# Altium PCB MavSword_V1.0.PcbDoc
Units mm, origin at the board's own origin, x right, y up, seen from the top; angles counter-clockwise.
Board outline 51.45 x 45.02 mm, 2 copper layers (Top Layer, Bottom Layer), stack 1.271 mm thick; 108 components, 87 nets, 345 pads, 147 vias.
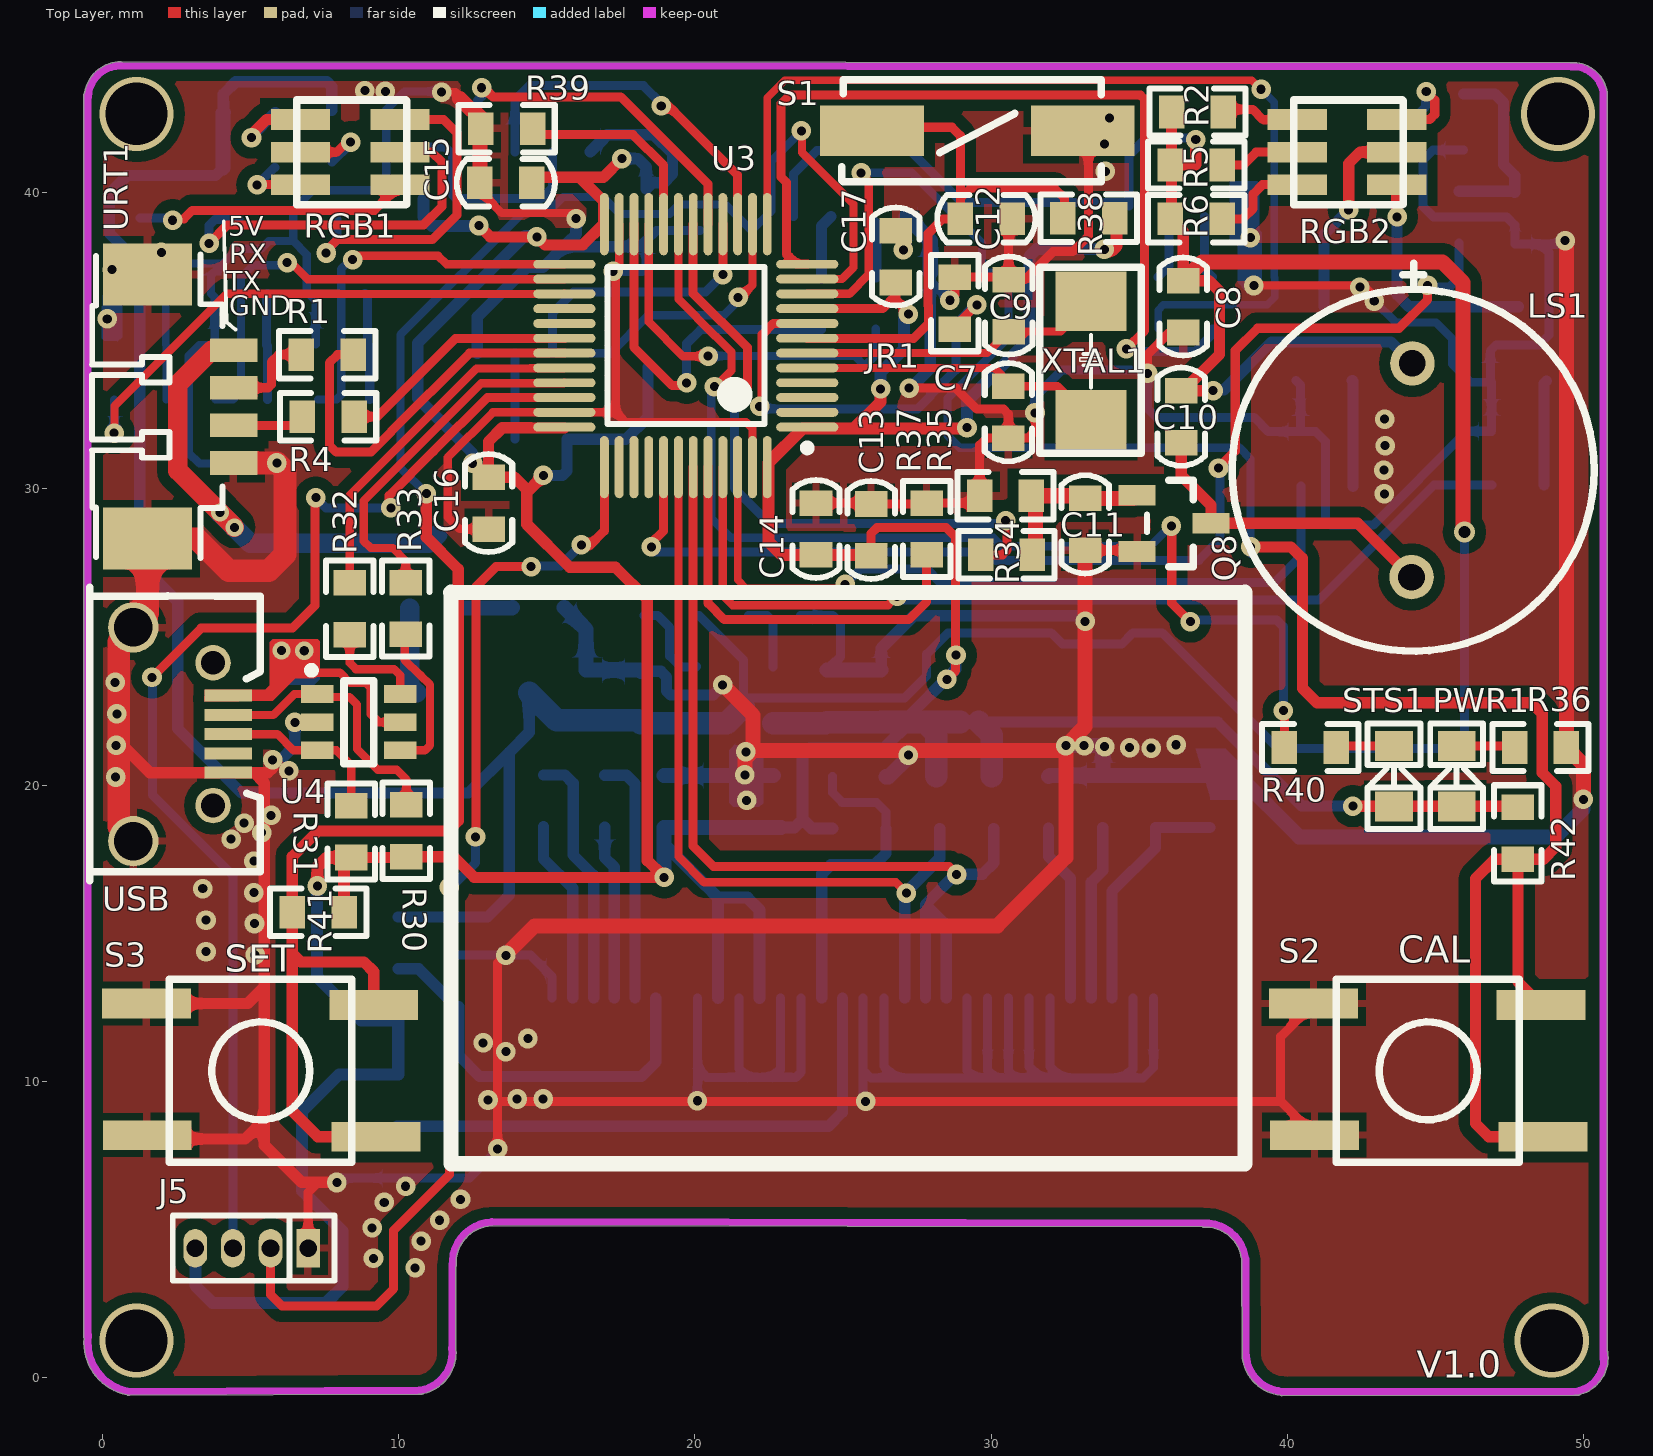
[diagram p0: Top Layer view]
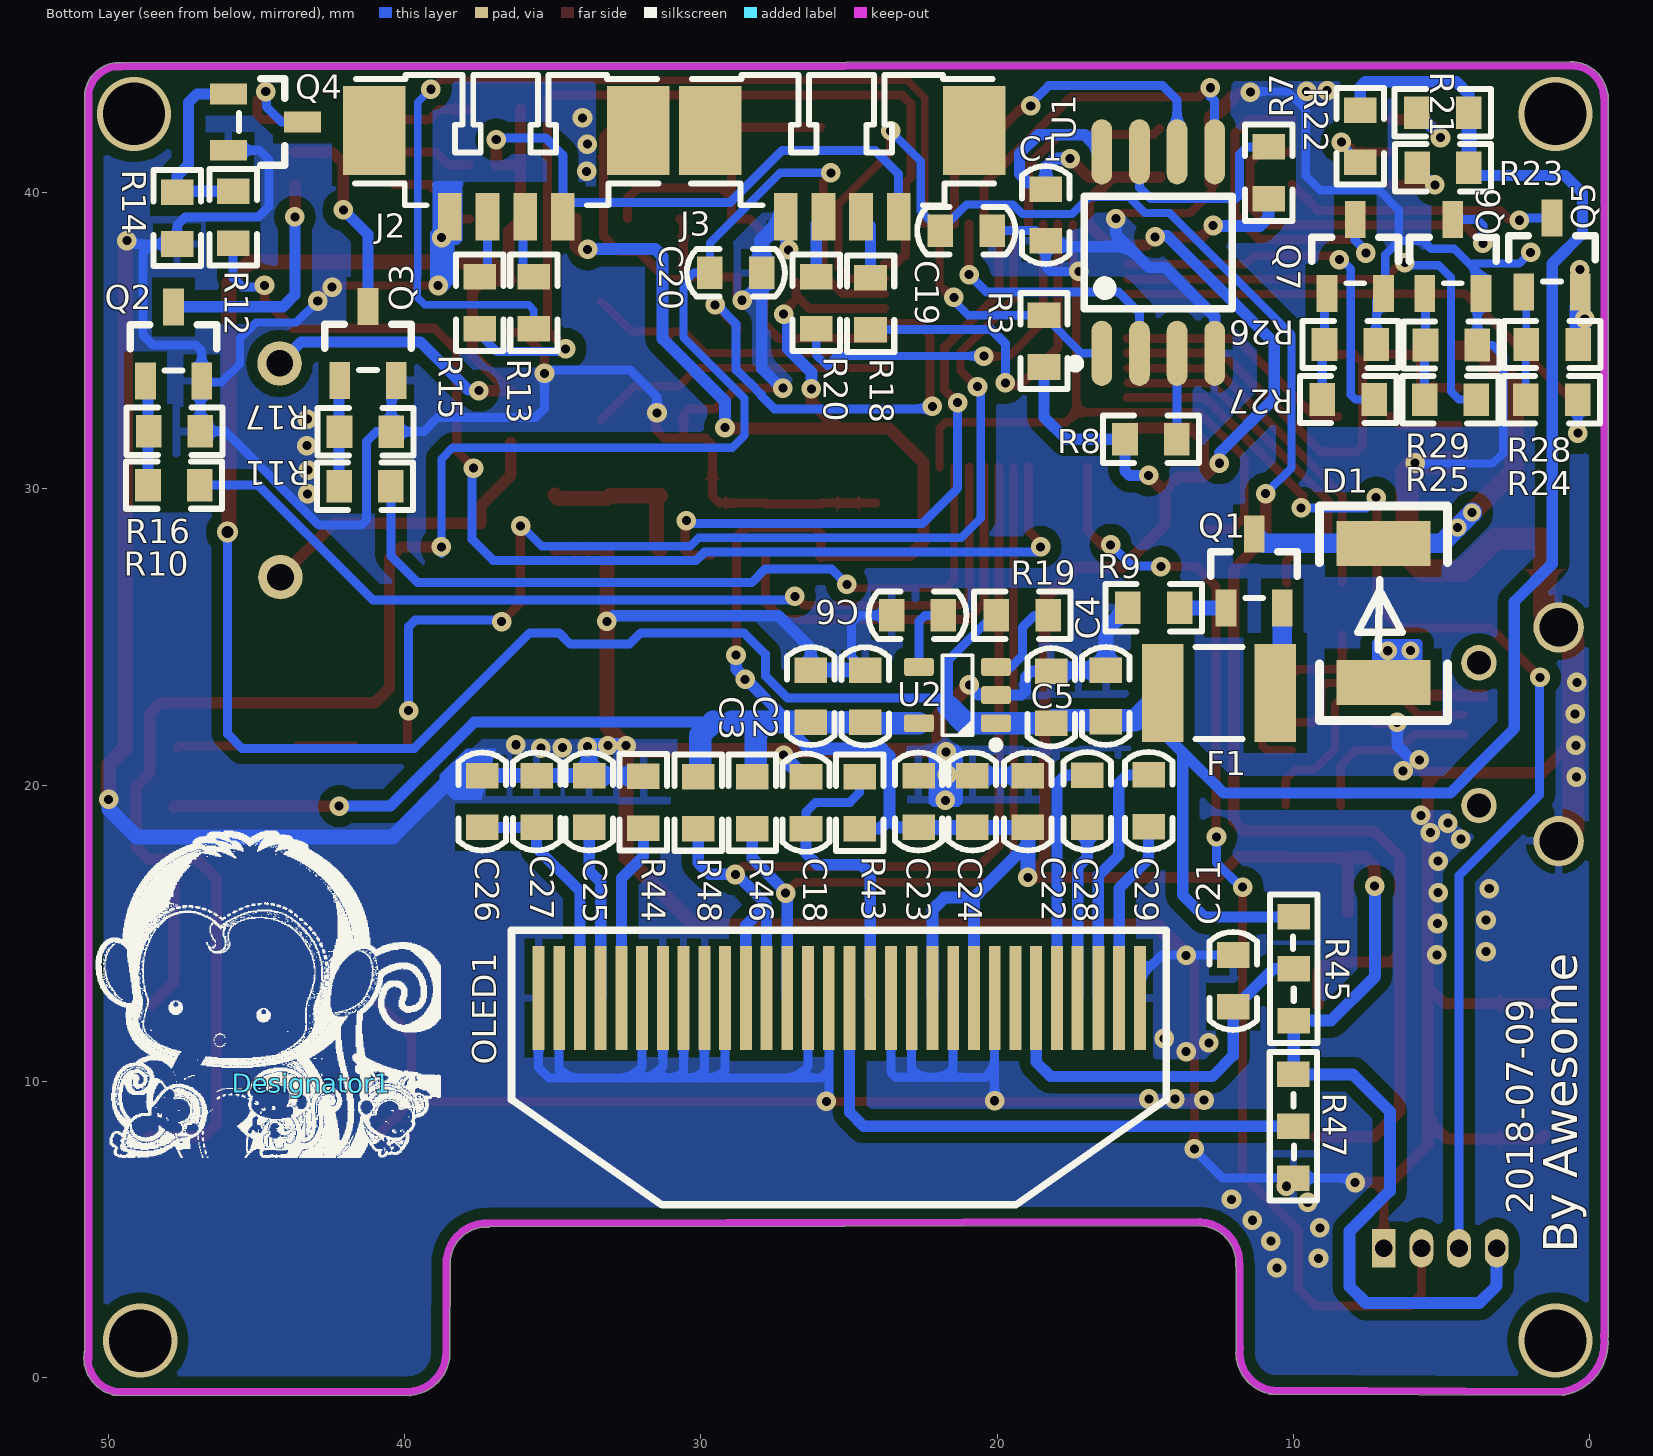
[diagram p1: Bottom Layer view, seen from below]
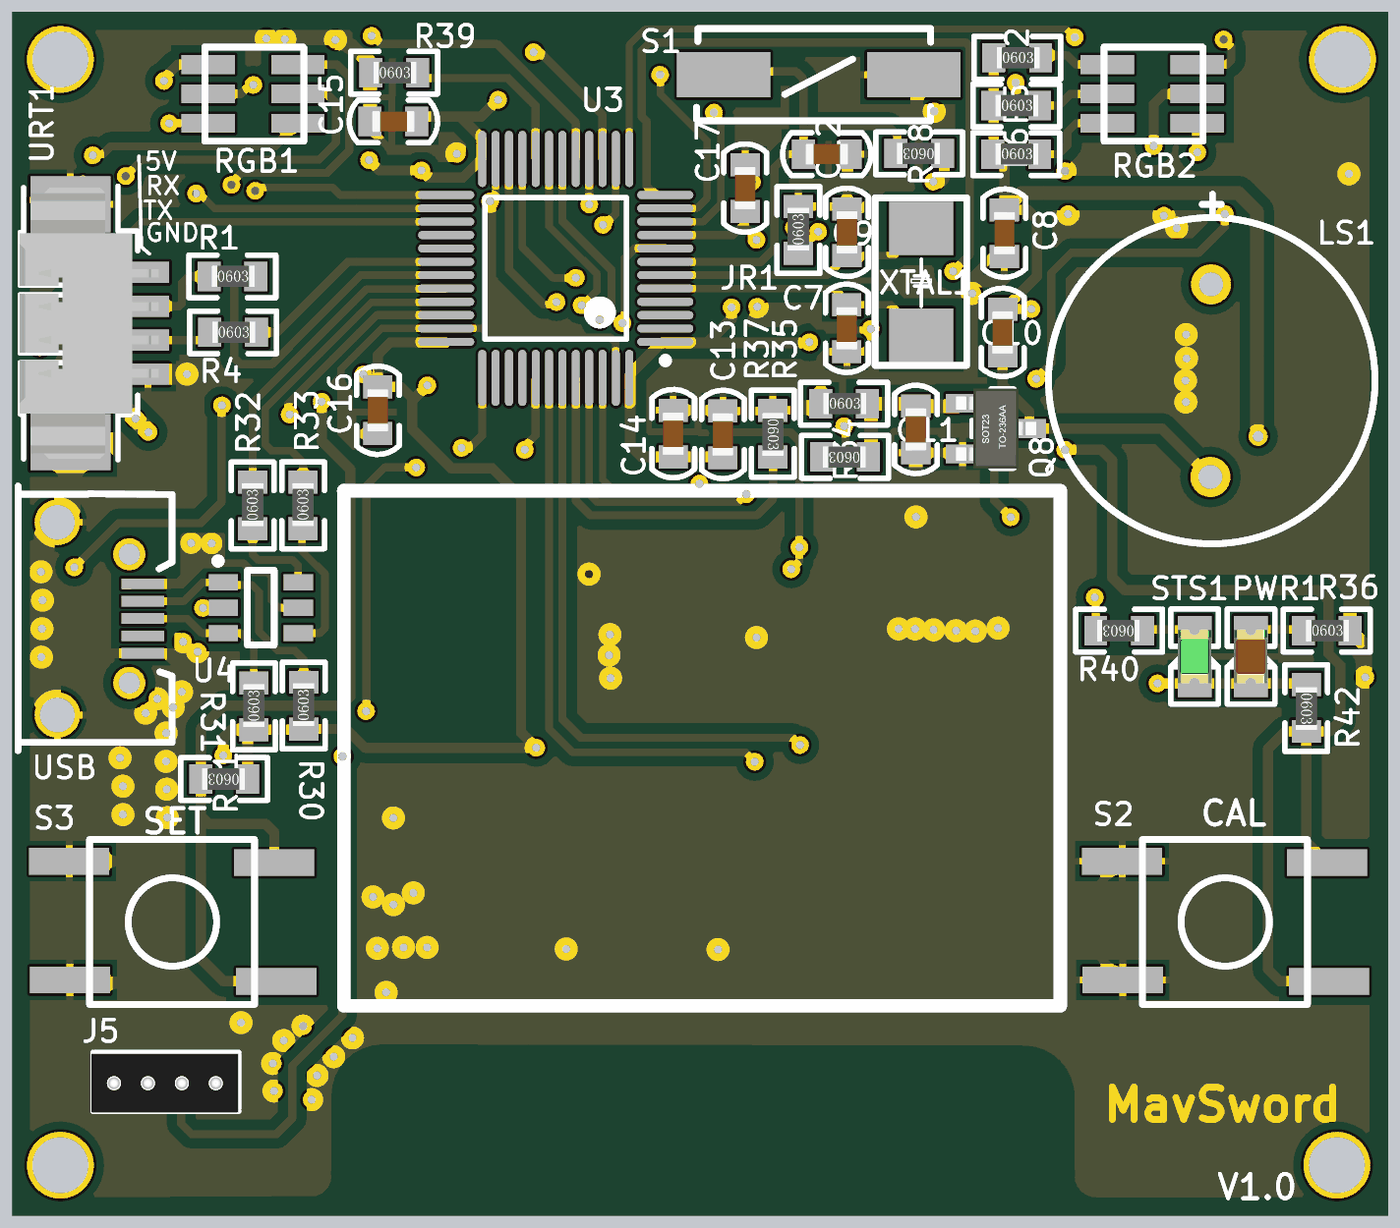
[diagram p2: 3D render of the assembled board from above, using the file's embedded part models]
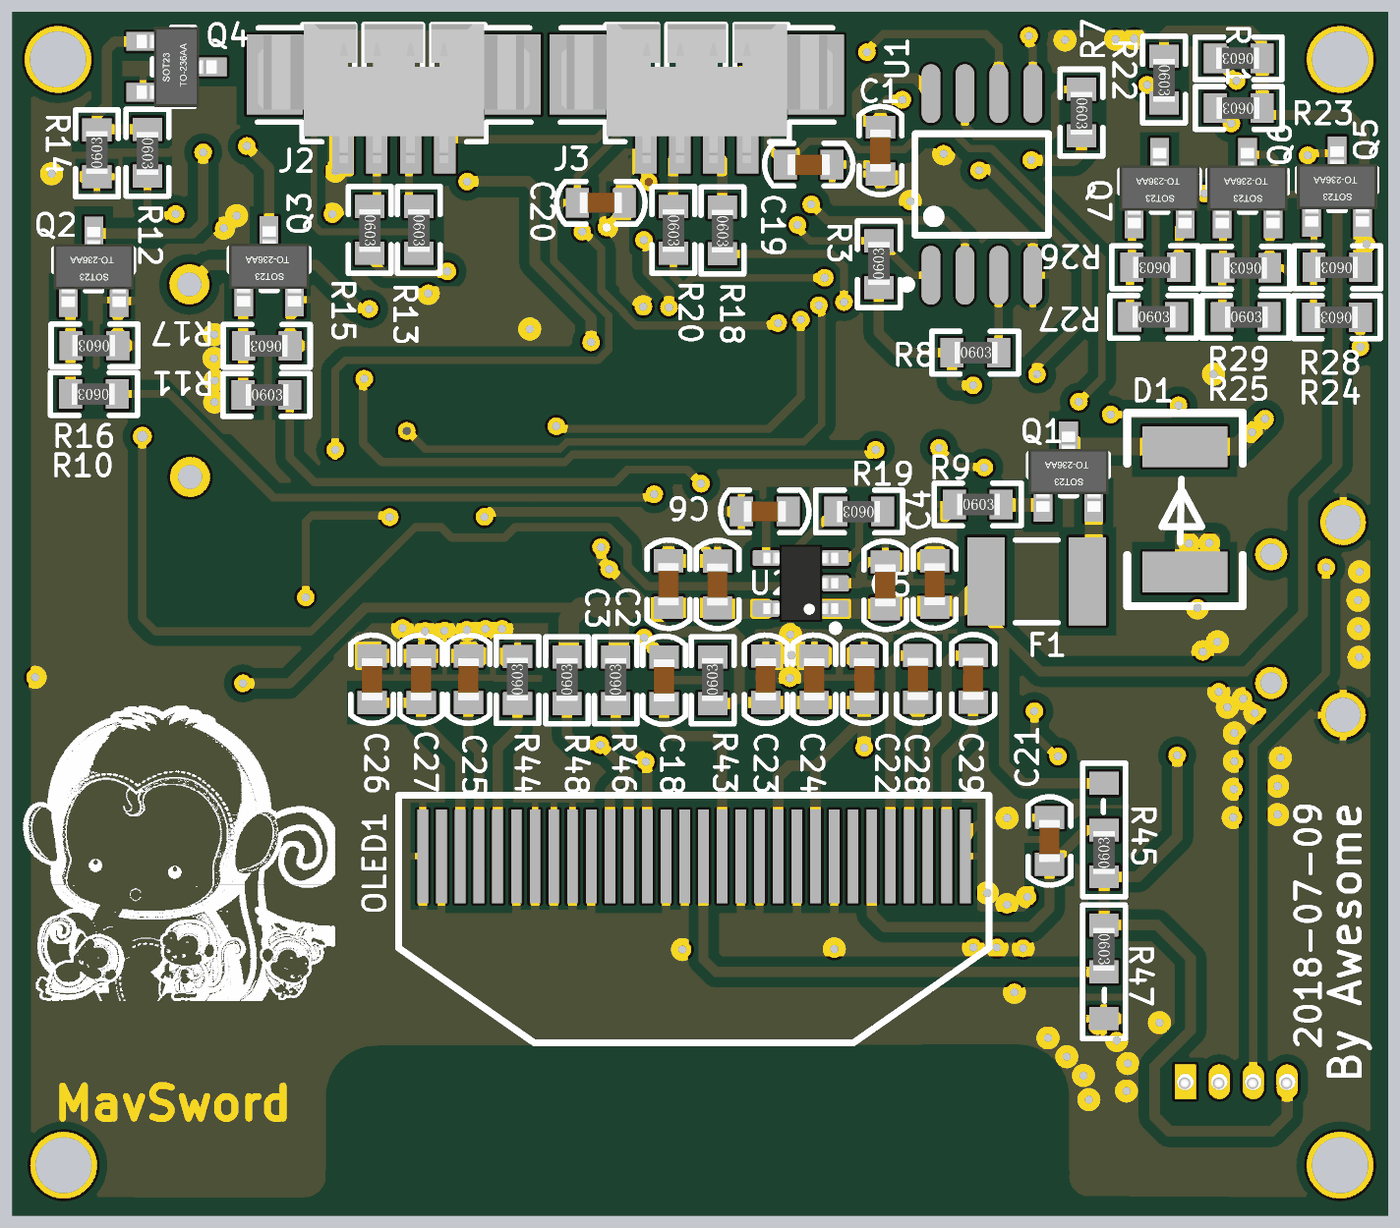
[diagram p3: 3D render of the assembled board from below, using the file's embedded part models]

## Layer stack, top to bottom
Top Solder: solder mask 0.0102, Solder Resist, Dk 3.5
Top Layer: signal copper 0.0356
Dielectric1: core 1.2, FR-4, Dk 4.8
Bottom Layer: signal copper 0.0356
Bottom Solder: solder mask 0.0102, Solder Resist, Dk 3.5

## Board outline
0.824,-0.586 ccw(c0.892,-0.478) 0.892,-0.605 10.659,-0.557 ccw(c10.701,-0.437) 10.718,-0.563 ccw(c10.527,0.834) 10.76,-0.557 10.783,-0.557 ccw(c10.782,-0.429) 10.846,-0.54 ccw(c10.527,0.834) 11.919,0.604 ccw(c11.808,0.668) 11.936,0.668 11.936,0.765 ccw(c10.527,0.834) 11.938,0.834 ccw(c10.527,0.834) 11.936,0.903 11.936,3.744 ccw(c11.816,3.787) 11.943,3.787 ccw(c11.816,3.787) 11.943,3.794 cw(c13.204,3.86) 13.138,5.12 ccw(c13.132,5.248) 13.167,5.125 37.132,5.082 ccw(c37.158,5.207) 37.164,5.08 cw(c37.225,3.844) 38.46,3.905 ccw(c38.588,3.912) 38.463,3.884 38.473,0.911 ccw(c38.595,0.876) 38.468,0.879 ccw(c39.914,0.846) 39.756,-0.592 ccw(c39.83,-0.488) 39.83,-0.615 49.701,-0.595 ccw(c49.736,-0.472) 49.757,-0.598 ccw(c49.544,0.664) 49.775,-0.595 49.81,-0.595 ccw(c49.809,-0.467) 49.886,-0.569 ccw(c49.544,0.664) 50.824,0.664 ccw(c49.544,0.664) 50.806,0.877 ccw(c50.681,0.856) 50.796,0.911 50.791,43.223 ccw(c50.676,43.277) 50.803,43.277 ccw(c50.676,43.277) 50.803,43.284 ccw(c49.639,43.216) 49.571,44.379 ccw(c49.578,44.252) 49.553,44.377 0.631,44.407 cw(c0.61,43.188) 0.632,44.407 0.631,44.407 ccw(c0.61,43.188) -0.596,43.372 ccw(c-0.495,43.294) -0.623,43.294 -0.623,1.369 ccw(c-0.495,1.369) -0.615,1.324 ccw(c1.177,1.177)

## Design rules (kind name [scope] priority, off if disabled: settings)
Clearance [All] p1: gap=0.191
HoleSize [All] p1: absolutevalues=TRUE maxlimit=5.08 minlimit=0.025 maxpercent=80.000 minpercent=20.000
HoleToHoleClearance [All] p1: gap=0.051 allowstackedmicrovias=TRUE
MinimumSolderMaskSliver [All] p1: minsoldermaskwidth=-0.051
PolygonConnect PolygonConnect_1 [IsPad] p1: connectstyle=Relief reliefconductorwidth=0.254 reliefentries=4 polygonreliefangle="90 Angle" airgapwidth=0.254
PolygonConnect [All] p2: connectstyle=Direct reliefconductorwidth=0.254 reliefentries=4 polygonreliefangle="90 Angle" airgapwidth=0.254
RoutingVias [All] p1: holewidth=0.305 width=0.508 viastyle="Through Hole" minholewidth=0.305 minwidth=0.508 maxholewidth=0.711 maxwidth=1.27
SilkToSilkClearance [All] p1: silktosilkclearance=-0.254
SilkToSolderMaskClearance SilkscreenOverComponentPads [IsPad] p1: minsilkscreentomaskgap=-0.254 clearancetoexposedcopper=TRUE
SolderMaskExpansion [All] p1: expansion=0.102
Width [All] p1: maxlimit=2.032 minlimit=0.178 preferedwidth=0.254
25 further rules are at their usual default settings.

## Components (designator, comment, footprint, x,y, rotation, side; value= is the part's Value field where it differs from the comment)
C1 "0.1uF" C0603B 18.357,39.24 r90 bottom
C2 "1uF/16V" C0603B 24.455,22.992 r90 bottom
C3 "0.1uF" C0603B 26.289,23.001 r90 bottom
C4 "1uF/16V" C0603B 16.327,23.005 r90 bottom
C5 "0.1uF" C0603B 18.176,22.962 r270 bottom
C6 "22nF" C0603B 22.686,25.728 r180 bottom
C7 "22p" C0603B 30.584,32.586 r270 top
C8 "0.1uF" C0603B 36.485,36.149 r90 top
C9 "22p" C0603B 30.592,36.181 r90 top
C10 "0.1uF" C0603B 36.416,32.433 r90 top
C11 "0.1uF" C0603B 33.17,28.799 r90 top
C12 "0.1uF" C0603B 29.836,39.108 r180 top
C13 "4.7uF/16V" C0603B 25.949,28.611 r90 top
C14 "0.1uF" C0603B 24.089,28.642 r270 top
C15 "0.1uF" C0603B 13.619,40.33 r0 top
C16 "0.1uF" C0603B 13.035,29.515 r90 top
C17 "0.1uF" C0603B 26.782,37.837 r270 top
C18 "4.7uF" C0603B 26.452,19.404 r90 bottom
C19 "0.1uF" C0603B 21.04,38.715 r0 bottom
C20 "0.1uF" C0603B 28.819,37.287 r0 bottom
C21 "0.1uF" C0603B 12.032,13.387 r90 bottom
C22 "0.1uF" C0603B 18.961,19.444 r90 bottom
C23 "0.1uF" C0603B 22.652,19.444 r90 bottom
C24 "Cap Pol1" C0603B 20.833,19.444 r90 bottom
C25 "4.7uF" C0603B 33.772,19.444 r90 bottom
C26 "2.2uF" C0603B 37.379,19.444 r90 bottom
C27 "0.1uF" C0603B 35.545,19.444 r270 bottom
C28 "Cap Pol1" C0603B 16.954,19.454 r90 bottom
C29 "Cap Pol1" C0603B 14.887,19.464 r90 bottom
D1 "SS24" D1812 7.015,28.28 r90 bottom
Designator1 "Comment" houzi 43.142,9.952 r180 bottom
F1 "1.5A/8V" 1812 12.509,23.109 r0 bottom
J2 "UART2" SIPA4-1.27-SMT-H 34.661,39.187 r0 bottom
J3 "UART3" SIPA4-1.27-SMT-H 23.322,39.187 r0 bottom
J5 "SWD" SIP4-1.27 6.947,4.366 r0 top
JR1 "0R" R0603B 28.776,36.266 r90 top
LS1 "Bell" BEEP12*7.5 44.191,34.232 r270 top locked
OLED1 "0.96OLED" 0.96OLED 15.182,12.812 r0 bottom locked
PWR1 "LED" LED0805R 45.71,20.295 r90 top
Q1 "PMOS-2" SOT-23-3 11.148,27.244 r270 bottom
Q2 "S8050" SOT-23-3 47.622,34.915 r270 bottom
Q3 "S8050" SOT-23-3 41.059,34.932 r270 bottom
Q4 "S8050" SOT-23-3 44.671,42.202 r0 bottom
Q5 "S8050" SOT-23-3 1.095,37.92 r270 bottom
Q6 "S8050" SOT-23-3 4.445,37.861 r270 bottom
Q7 "S8050" SOT-23-3 7.737,37.861 r270 bottom
Q8 "S8050" SOT-23-3 36.192,28.656 r180 top
R1 "120" R0603B 7.592,34.529 r0 top
R2 "150" R0603B 36.965,42.718 r0 top
R3 "10K" R0603B 18.418,34.985 r90 bottom
R4 "120" R0603B 7.62,32.436 r0 top
R5 "180" R0603B 36.927,40.927 r0 top
R6 "180" R0603B 36.927,39.108 r0 top
R7 "10K" R0603B 10.833,40.662 r270 bottom
R8 "10K" R0603B 14.808,31.674 r180 bottom
R9 "10K" R0603B 14.716,25.987 r180 bottom
R10 "4.7K" R0603B 47.786,30.124 r0 bottom
R11 "4.7K" R0603B 41.337,30.086 r180 bottom
R12 "4.7K" R0603B 45.789,39.164 r270 bottom
R13 "120" R0603B 35.634,36.274 r270 bottom
R14 "3.3K" R0603B 47.678,39.136 r90 bottom
R15 "120" R0603B 37.468,36.274 r270 bottom
R16 "3.3K" R0603B 47.766,31.941 r0 bottom
R17 "3.3K" R0603B 41.322,31.928 r0 bottom
R18 "120" R0603B 24.272,36.248 r270 bottom
R19 "10K" R0603B 19.154,25.725 r0 bottom
R20 "120" R0603B 26.109,36.274 r270 bottom
R21 "150" R0603B 4.958,42.697 r0 bottom
R22 "180" R0603B 7.747,41.897 r270 bottom
R23 "180" R0603B 4.95,40.836 r0 bottom
R24 "4.7K" R0603B 1.278,33.002 r0 bottom
R25 "4.7K" R0603B 4.695,33.01 r180 bottom
R26 "4.7K" R0603B 8.151,33.012 r180 bottom
R27 "3.3K" R0603B 8.075,34.869 r0 bottom
R28 "3.3K" R0603B 1.26,34.869 r0 bottom
R29 "3.3K" R0603B 4.665,34.851 r0 bottom
R30 "1.5K" R0603B 10.262,18.456 r90 top
R31 "1.5K" R0603B 8.4,18.428 r90 top
R32 "22" R0603B 8.352,25.95 r90 top
R33 "22" R0603B 10.239,25.956 r90 top
R34 "4.7K" R0603B 30.518,27.767 r180 top
R35 "3.3K" R0603B 30.486,29.764 r0 top
R36 "1K" R0603B 48.543,21.265 r0 top
R37 "10K" R0603B 27.821,28.641 r270 top
R38 "10k" R0603B 33.296,39.134 r180 top
R39 "10K" R0603B 13.645,42.156 r0 top
R40 "1K" R0603B 40.775,21.265 r180 top
R41 "4.7K" R0603B 7.289,15.707 r180 top
R42 "4.7K" R0603B 47.78,18.367 r270 top
R43 "10K" R0603B 24.638,19.404 r90 bottom
R44 "910K" R0603B 31.938,19.414 r90 bottom
R45 "3RES" 3JUMP0603*2 9.987,12.045 r90 bottom
R46 "4.7K" R0603B 28.265,19.406 r90 bottom
R47 "3RES" 3JUMP0603*2 9.997,10.236 r270 bottom
R48 "4.7K" R0603B 30.086,19.406 r90 bottom
RGB1 "RGB3535" RGB3535 6.943,42.462 r0 top
RGB2 "RGB3535" RGB3535 40.59,42.462 r0 top
S1 "SW-PB" SW2PIN_8.2*3.5 33.724,43.81 r180 top
S2 "SW-PB" SW4PIN_9.2*6.15*9 48.633,8.131 r180 top
S3 "SW-PB" SW4PIN_9.2*6.15*9 9.235,8.131 r180 top
STS1 "LED" LED0805G 43.599,20.295 r90 top
U1 "W25Qxx" SOIC-8_208mil 14.562,37.973 r180 bottom
U2 "RT9193" SOT23-5 21.339,23.035 r0 bottom
U3 "STM32F103C8T6" LQFP48_M_STM32 19.694,34.829 r180 top locked
U4 "USBLC6_2" SOT-23-6 8.656,22.121 r180 top locked
URT1 "UART1" SIPA4-1.27-SMT-H 4.43,34.679 r270 top locked (schematic designator J1)
USB "USB-5" MICRO-USB 5.26,21.725 r180 top (schematic designator J4)
XTAL1 "8M" XL5032 33.371,36.329 r270 top

## Footprints (in the part's own frame and the unit in brackets; to place one, negate y for a bottom-side part, rotate by r counter-clockwise, add the part's x,y. Pads: shape width x height; smd on the part's side, far side on the other; paste and mask are expansions set on the pad)
0.96OLED [mm]
  rect 0.4x3.5 smd: 1(0,0) 2(0.7,0) 3(1.4,0) 4(2.1,0) 5(2.8,0) 6(3.5,0) 7(4.2,0) 8(4.9,0) 9(5.6,0) 10(6.3,0) 11(7,0) 12(7.7,0) 13(8.4,0) 14(9.1,0) 15(9.8,0) 16(10.5,0) 17(11.2,0) 18(11.9,0) 19(12.6,0) 20(13.3,0) 21(14,0) 22(14.7,0) 23(15.4,0) 24(16.1,0) 25(16.8,0) 26(17.5,0) 27(18.2,0) 28(18.9,0) 29(19.6,0) 30(20.3,0)
  silkscreen extent -0.89,-2.29 21.21,6.98
3JUMP0603*2 [mm]
  rect 0.862x1.1 smd: 1(0,0) 2(1.75,0) 3(3.503,0)
  silkscreen extent -0.75,-0.8 4.25,0.8, body extent 0.1,-0.4 1.7,0.4, height 0.45
1812 [mm] "Chip Capacitor, Body 4.5x3.2mm, IPC High Density"
  rect 1.4x3.3 smd: 1(-1.9,0) 2(1.9,0)
  silkscreen extent -0.8,-1.55 0.8,1.55, body extent -2.4,-1.7 2.4,1.7, height 1.4
BEEP12*7.5 [mm]
  round 1.5 hole 0.9: 1(0,0.025) 2(7.214,0)
  silkscreen extent -3.38,-6.05 9.71,6.16
C0603B [mm]
  rect 0.862x1.1 smd: 1(-0.875,0) 2(0.875,0)
  silkscreen extent -1.66,-0.8 1.66,0.8, body extent -0.8,-0.4 0.8,0.4, height 0.6
D1812 [mil]
  rect 60x125 smd: 1(-190,-2) 2(-5,-2)
  silkscreen extent -240,-87 45,83
houzi [mm]
  silkscreen extent -7.29,-2.54 4.37,8.48
LED0805G [mil]
  rect 40x50 smd: 1(-40,0) 2(40,0)
  silkscreen extent -70,-35 70,35, body extent -40,-25 40,25, height 43
LED0805R [mil]
  rect 40x50 smd: 1(-40,0) 2(40,0)
  silkscreen extent -70,-35 70,35, body extent -40,-24 40,25, height 43
LQFP48_M_STM32 [mm] "Thin QFP, 48-Leads, Body 7x7mm, Pitch 0.5mm, IPC Low Density"
  oval 2.1x0.3 smd: 1(-4.1,2.75) 2(-4.1,2.25) 3(-4.1,1.75) 4(-4.1,1.25) 5(-4.1,0.75) 6(-4.1,0.25) 7(-4.1,-0.25) 8(-4.1,-0.75) 9(-4.1,-1.25) 10(-4.1,-1.75) 11(-4.1,-2.25) 12(-4.1,-2.75) 25(4.1,-2.75) 26(4.1,-2.25) 27(4.1,-1.75) 28(4.1,-1.25) 29(4.1,-0.75) 30(4.1,-0.25) 31(4.1,0.25) 32(4.1,0.75) 33(4.1,1.25) 34(4.1,1.75) 35(4.1,2.25) 36(4.1,2.75)
  oval 0.3x2.1 smd: 13(-2.75,-4.1) 14(-2.25,-4.1) 15(-1.75,-4.1) 16(-1.25,-4.1) 17(-0.75,-4.1) 18(-0.25,-4.1) 19(0.25,-4.1) 20(0.75,-4.1) 21(1.25,-4.1) 22(1.75,-4.1) 23(2.25,-4.1) 24(2.75,-4.1) 37(2.75,4.1) 38(2.25,4.1) 39(1.75,4.1) 40(1.25,4.1) 41(0.75,4.1) 42(0.25,4.1) 43(-0.25,4.1) 44(-0.75,4.1) 45(-1.25,4.1) 46(-1.75,4.1) 47(-2.25,4.1) 48(-2.75,4.1)
  silkscreen extent -4.23,-2.65 2.65,3.57, body extent -3.5,-3.5 3.5,3.5, height 1.6
MICRO-USB [mm]
  rect 1.6x0.4 smd: 1(1.016,-1.291) 2(1.016,-0.641) 3(1.016,0.009) 4(1.016,0.659) 5(1.016,1.309)
  round 1.2 hole 0.8: 6(1.524,2.419) 7(1.524,-2.4)
  round 1.7 hole 1.3: 8(4.216,3.62) 8(4.216,-3.594)
  silkscreen extent -0.08,-4.95 5.69,4.95
R0603B [mm]
  rect 0.862x1.1 smd: 1(-0.875,0) 2(0.875,0)
  silkscreen extent -1.63,-0.8 1.62,0.8, body extent -0.77,-0.4 0.83,0.4, height 0.45
RGB3535 [mm]
  rect 2x0.7 smd: 1(-0.254,0) 2(-0.254,-1.1) 3(-0.254,-2.2) 4(3.103,0) 5(3.103,-1.1) 6(3.103,-2.2)
  silkscreen extent -0.38,-2.87 3.33,0.66
SIP4-1.27 [mm]
  rect 0.8x1.3 hole 0.6: 1(0,0)
  oval 0.8x1.3 hole 0.6: 2(-1.27,0) 3(-2.54,0) 4(-3.81,0)
  silkscreen extent -4.57,-1.1 0.89,1.1, body extent -4.62,-1.15 0.87,1.05, height 1.2
SIPA4-1.27-SMT-H [mm]
  rect 0.8x1.6 smd: 1(3.81,0) 2(2.54,0) 3(1.27,0) 4(0,0)
  rect 2.1x3 smd: ""(-2.55,-2.9) ""(6.36,-2.9)
  silkscreen extent -3.23,-4.78 7.01,-0.38, body extent -3.17,-4.79 6.98,0.41, height 3.4
SOIC-8_208mil [mm]
  oval 0.7x2.2 smd: 1(-1.905,-3.4) 2(-0.635,-3.4) 3(0.635,-3.4) 4(1.905,-3.4) 5(1.905,3.4) 6(0.635,3.4) 7(-0.635,3.4) 8(-1.905,3.4)
  silkscreen extent -2.95,-3.9 2.5,1.9
SOT23-5 [mm]
  round 0.5 on Mech14: 0(0,0)
  rrect25% 1x0.6 smd: 1(-1.3,0.95) 2(-1.3,0) 3(-1.3,-0.95) 4(1.3,-0.95) 5(1.3,0.95)
  silkscreen extent -1.42,-1.35 0.51,1.81, body extent -1.4,-1.45 1.4,1.45, height 1.44
SOT-23-3 [mm]
  rect 1.25x0.7 smd: 1(1.275,-1.125) 2(-1.225,-0.175) 3(1.275,0.775)
  silkscreen extent -0.62,-1.63 0.93,1.29, body extent -1.47,-1.67 1.53,1.33, height 1.3
SOT-23-6 [mm]
  rect 1.1x0.6 smd: 1(1.4,-0.95) 2(1.4,0) 3(1.4,0.95) 4(-1.4,0.95) 5(-1.4,0) 6(-1.4,-0.95)
  silkscreen extent -0.5,-1.87 1.72,1.4
SW2PIN_8.2*3.5 [mm]
  rect 3.5x1.7 smd: 1(0.635,1.727) 2(7.747,1.727)
  silkscreen extent 0,0 8.76,3.45
SW4PIN_9.2*6.15*9 [mm]
  rect 3x1 smd: 1(0,0) 1(0.076,-4.445) 2(7.722,-0.051) 2(7.747,-4.496)
  silkscreen extent 0.81,-5.31 6.98,0.86
XL5032 [mm]
  rect 2x2.4 smd: 1(0,0) 2(4,0)
  silkscreen extent -1.14,-1.73 5.13,1.7, body extent -0.84,-1.73 4.75,1.7, height 1.5

## Part data
C1 C3 C5 C6 C7 C8 C9 C10 C11 C12 C14 C15 C16 C17 C18 C19 C20 C21 C23 C25 C26 C27: library part Cap, "Capacitor"
C2 C4 C13 C22: library part "Cap Pol1", "Polarized Capacitor (Radial)"
C24 C28 C29: "Polarized Capacitor (Radial)"
D1: library part "D Schottky", "Schottky Diode"
F1: library part "Fuse 1", "Fuse"
J2 J3 J5 URT1: library part "Header 4", "Header, 4-Pin"
JR1: library part Res1, "Resistor"
LS1: "Electrical Bell"
Q1: "P-Channel Power MOSFET"
Q2 Q3 Q4 Q5 Q6 Q7 Q8: library part NPN, "NPN Bipolar Transistor"
R1 R2 R3 R4 R5 R6 R7 R8 R9 R10 R11 R12 R13 R14 R15 R16 R17 R18 R19 R20 R21 R22 R23 R24 R25 R26 R27 R28 R29 R30 R31 R32 R33 R34 R35 R36 R37 R38 R39 R40 R41 R42 R43 R44 R46 R48: library part Res3, "Resistor"
R45 R47: library part 3JumpR
S1 S2 S3: "Switch"
U1: library part W25QXX
U2: library part TLV70033
U3: library part STM32F101C8T6, "STM32 ARM-based 32-bit MCU with 64 Kbytes Flash, 48-pin LQFP, Industrial Temperature"
USB: library part USB5
XTAL1: library part XTAL, "Crystal Oscillator"

## Via types
v1: diameter 0.66, hole 0.305, Top Layer to Bottom Layer, 138 vias
v2: diameter 2.5, hole 2.1, Top Layer to Bottom Layer, 4 vias
v3: diameter 0.61, hole 0.305, Top Layer to Bottom Layer, 4 vias
v4: diameter 0.711, hole 0.406, Top Layer to Bottom Layer, 1 vias

## Nets (pads, with @x,y where several pads share a name; then routed paths per layer and width w, separated by ;. In a path a pad name is that pad's centre, name@x,y a point inside that pad or via, vN(x,y) a via of type N, cw(c..) or ccw(c..) an arc to the next point about the centre after c; other vN are vias at no path point)
3V3-STM: C1.2 C2.1 C3.1 C13.1 C14.2 C15.2 C16.2 C17.2 C22.1 C23.1 C24.1 J5.4 OLED1.9 OLED1.11 PWR1.1 R3.1 R7.2 R8.1 R30.1 R31.1 R38.1 R41.1 R42.1 R43.1 R45.1 R46.2 R47.1 R48.2 STS1.1 U1.8 U2.5 U3.1 U3.9 U3.24 U3.36 U3.48 | length 200.6
  Top Layer w0.305: 13.833,32.079 U3.36 ; U3.9 26.335,36.079 26.782,36.525 ; C13.1 25.949,28.491 26.147,28.689 28.484,28.689 28.804,28.369 28.804,23.863 v1(28.506,23.566) ; C17.2 26.782,36.525 ; v1@27.14,36.043 26.782,36.401 26.782,36.525
  Top Layer w0.381: R31.1 10.234,17.553 R30.1 11.855,17.581 12.555,16.881 v1(18.961,16.881) 18.395,17.447 18.395,26.271 17.32,27.346 15.778,27.346 14.323,28.801 14.323,29.878 ; v1@12.551,30.874 C16.2 ; v1(12.71,38.885) 13.096,38.499 v1(14.666,38.499) 14.938,38.227 16.211,38.227 16.913,38.929 16.913,39.714 16.111,40.516 ; C15.2@14.503,40.516 16.111,40.516 ; v1@14.966,30.521 14.323,29.878 ; U3.36@15.594,32.048 14.463,32.048 14.463,32.058 13.496,32.058 13.035,31.598 C16.2 ; v1@17.582,41.186 v1(17.539,41.143) 16.911,40.516 16.111,40.516 ; v1@42.134,19.279 STS1.1 PWR1.1 47.743,19.279 R42.1 ; C16.2 13.905,30.39 14.323,29.972 14.323,29.878
  Top Layer w0.406: v1(7.254,16.591) 7.254,17.231 7.576,17.553 R31.1 8.164,17.316 R41.1 ; C13.1 25.917,27.767 C14.2 22.926,27.767 22.487,28.206 22.487,30.885 23.638,32.035 25.37,32.035 ; v1(26.271,33.371) 26.271,32.937 25.37,32.035 ; v1(29.185,32.065) 29.155,32.035 25.37,32.035 ; v1(33.823,38.08) 33.924,38.08 33.99,38.014 34.046,38.07 34.077,38.039 34.23,38.193 R38.1@34.23,39.129
  Bottom Layer w0.381: v1(12.497,30.861) 12.497,31.206 10.648,33.056 10.648,34.92 14.272,38.544 v1@14.569,38.544 ; v1(14.887,30.45) 15.535,30.45 15.683,30.598 R8.1 17.678,31.674 18.418,32.413 R3.1 ; U1.8 17.042,41.948 18.613,41.948 19.243,41.318 19.243,40.622 18.948,40.328 18.569,40.328 C1.2 18.357,40.858 18.072,41.143 v1(17.539,41.143) ; 27.021,22.126 28.804,23.909 v1@28.804,24.346 ; 28.959,22.126 29.578,22.126 37.645,22.126 40.483,19.289 v1(42.212,19.289)
  Bottom Layer w0.406: J5.4 3.137,3.101 3.724,2.515 7.549,2.515 8.1,3.066 8.1,4.945 6.746,6.299 6.746,8.987 7.996,10.236 R47.1 9.987,10.246 R45.1 8.735,12.045 7.242,13.538 v1@7.242,16.566 ; R7.2 10.833,39.167 11.125,38.875 v1@12.784,38.875 ; 18.961,18.009 20.34,16.629 20.35,16.629 20.782,16.198 ; OLED1.9 20.782,16.198 ; OLED1.11 22.182,15.789 21.773,16.198 20.782,16.198 ; C23.1@22.906,18.569 23.369,18.569 23.637,18.837 ; R43.1 23.945,18.529 23.637,18.837 ; v1(26.271,33.371) 26.271,33.929 27.052,34.71 27.052,35.737 27.208,35.893 v1(27.206,35.895) ; 27.282,22.126 27.264,22.126 26.429,21.29 26.429,21.273 26.38,21.224 23.873,21.224 23.637,20.988 23.637,18.837 ; v1(29.185,32.065) 29.185,32.958 31.29,35.064 31.29,37.841 31.539,38.09 33.818,38.09 33.823,38.085 v1(33.823,38.08)
  Bottom Layer w0.508: v1@18.961,16.901 18.961,18.009 C22.1 C24.1 C23.1 C23.1@22.906,18.569
  Bottom Layer w0.762: U2.5 24.423,22.085 C2.1 26.28,22.117 C3.1 27.021,22.126 27.264,22.126 ; 27.282,22.126 27.755,22.126 ; R46.2@28.148,20.289 28.148,21.732 27.755,22.126 ; 28.959,22.126 27.755,22.126 ; 29.578,22.126 30.023,21.681 R48.2@30.023,20.289
  other v1: 28.814,24.384
5V-OUT: C4.1 C5.2 C8.2 C10.2 F1.2 J2.4 J3.4 LS1.1 R2.1 R5.1 R6.1 R19.2 R21.1 R22.1 R23.1 R45.3 U2.1 | length 158.4
  Top Layer w0.381: R5.1 R5.1@36.086,40.927 ; R2.1@36.086,42.807 R5.1@36.086,40.927 ; C10.2 C10.2@36.481,33.308 ; v1(36.906,41.783) 36.906,40.942 36.891,40.927 R5.1@36.086,40.927 ; v1(37.49,33.31) 37.489,33.308 C10.2@36.481,33.308 ; R5.1@36.086,40.927 36.086,39.143 R6.1 36.485,38.675 C8.2 37.347,37.024 37.706,36.665 37.706,34.534 C10.2@36.481,33.308
  Top Layer w0.508: C8.2 37.116,37.655 45.235,37.655 45.931,36.96 v4@45.931,28.471
  Bottom Layer w0.305: R19.2 20.135,25.725 21.646,24.214 21.646,22.931 ; 21.646,22.657 21.646,22.931 ; J3.4 23.322,40.622 24.122,41.422 27.247,41.422 29.002,39.667 34.541,39.667 34.661,39.548 34.661,41.257 35.242,41.839 v1@36.888,41.839 ; v4(45.977,28.539) 45.977,21.725 45.489,21.237 39.67,21.237 35.768,25.138 34.788,25.138 34.402,24.752 32.413,24.752 32.027,25.138 28.545,25.138 27.826,24.42 27.826,23.685 27.071,22.931 21.646,22.931
  Bottom Layer w0.381: R23.1 3.814,40.574 0.838,40.574 0.244,39.98 0.244,38.613 1.262,37.595 1.262,27.47 2.54,26.192 2.54,21.907 4.143,20.305 4.143,20.287 4.697,19.733 12.362,19.733 13.736,21.107 ; R21.1 4.083,43.321 4.501,43.739 7.574,43.739 7.747,43.566 R22.1 ; R45.3 12.997,15.547 13.736,16.286 13.736,21.107 ; F1.2 14.41,21.781 13.736,21.107 ; 37.851,33.335 39.469,34.953 43.495,34.953 LS1.1
  Bottom Layer w0.508: R23.1 4.075,42.69 R21.1
  Bottom Layer w0.762: F1.2 15.337,22.182 18.081,22.182 C5.2 C5.2 U2.1 21.074,22.085 21.646,22.657
5V-USB: D1.1 U4.5 USB.1 | length 4.2
  Top Layer w0.279: 7.064,23.79 8.015,23.79 8.363,23.442 8.893,23.442 9.063,23.271 9.063,22.388 9.329,22.121 U4.5
  other v3: 6.05,24.544 6.815,24.531
5V-VIN: D1.2 Q1.2 URT1.4 | length 15.9
  Top Layer w0.66: URT1.4 3.697,34.679 2.548,33.53 2.548,30.612 v3@4.453,28.707
  Bottom Layer w0.66: v3(3.967,29.2) 3.967,29.18 v3(4.455,28.692) 4.994,28.153 D1.2 11.008,28.153 Q1.2
BEEP: R34.2 U3.18 | length 21.9
  Top Layer w0.305: U3.18 19.944,36.589 20.912,35.621 20.918,35.621 21.778,34.761 21.778,33.35 v1(21.336,32.908) v1@21.336,32.738 ; v1@21.514,32.789 v1@21.514,32.908 ; R34.2 30.376,27.767 30.538,27.93 30.538,28.869 v1(30.486,28.921)
  Bottom Layer w0.305: v1(21.336,32.908) 21.336,30.023 21.332,30.019 22.527,28.824 30.323,28.824 v1@30.486,28.988 ; v1(30.486,28.921) 30.492,28.921 v1@30.518,28.948
BOOT0: R37.2 U3.44 | length 14
  Top Layer w0.305: U3.44 20.444,26.135 20.993,25.585 27.214,25.585 27.821,26.192 R37.2
BOOT1: R39.2 U3.20 | length 6.9
  Top Layer w0.305: R39.2 14.723,41.953 17.91,41.953 18.944,40.919 U3.20
CAL_KEY: C20.2 R42.2 S2.1 U3.10 | length 71.3
  Top Layer w0.279: U3.10 25.215,36.579 25.867,37.231 25.867,40.381 v1@25.615,40.634
  Top Layer w0.381: v1(38.758,28.037) 40.124,28.037 40.51,27.65 40.51,23.264 40.998,22.776 48.235,22.776 48.606,22.405 48.606,20.411 49.055,19.962 49.055,17.902 48.645,17.492 R42.2 ; S2.1@48.557,12.576 47.78,13.353 R42.2 ; S2.1@48.633,8.131 46.792,8.131 46.35,8.572 46.35,16.845 46.996,17.492 R42.2
  Bottom Layer w0.279: v1(25.611,40.663) 27.324,40.663 29.694,38.293 C20.2 30.244,37.287 30.584,36.947 30.584,35.112 28.524,33.052 28.524,31.791 28.929,31.387 38.382,31.387 38.758,31.011 v1(38.758,28.037) v1@38.758,27.798
D/C: OLED1.15 R47.2 | length 19.1
  Bottom Layer w0.381: R47.2@9.947,8.484 24.508,8.484 24.982,8.957 OLED1.15
GND: C1.1 C2.2 C3.2 C4.2 C5.1 C6.1 C7.2 C8.1 C9.2 C11.1 C12.1 C13.2 C14.1 C15.1 C16.1 C17.1 C18.2 C19.1 C20.1 C21.2 C22.2 C23.2 C24.2 C25.2 C26.2 C27.1 J2.1 J3.1 J5.1 JR1.2 OLED1.1 OLED1.8 OLED1.10 OLED1.12 OLED1.13 OLED1.16 OLED1.17 OLED1.21 OLED1.22 OLED1.23 OLED1.24 OLED1.25 OLED1.29 OLED1.30 Q2.3 Q3.3 Q4.3 Q5.3 Q6.3 Q7.3 Q8.3 R9.1 R14.1 R16.1 R17.1 R27.1 R28.1 R29.1 R35.1 R36.2 R37.1 R39.1 R44.2 R47.3 S1.1 S2.2 S3.2 U1.4 U2.2 U3.23 U3.35 U3.47 U4.2 URT1. URT1.1 USB.5 USB.8 | length 432
  Top Layer w0.279: v1(11.45,43.386) 11.923,43.386 12.097,43.212 ; C15.1 12.744,40.044 13.48,39.309 v1@16.055,39.309 ; C16.1 12.061,28.64 11.656,29.045 11.656,31.057 13.178,32.579 U3.35 17.327,32.579 ; v1@17.239,37.28 17.327,37.192 17.327,32.579 ; v1@17.444,37.484 U3.23 ; U3.47 21.944,32.031 21.727,32.248 17.658,32.248 17.327,32.579 ; v1(38.865,36.86) 42.573,36.86 v1@43.035,36.398
  Top Layer w0.305: J5.1 6.947,6.251 7.287,6.591 ; v1(13.345,7.719) 13.345,9.324 ; v1@13.619,14.272 13.345,13.998 13.345,9.324 ; C14.1 C13.2@25.917,29.517 ; C13.2 27.79,29.486 R37.1 29.364,29.516 R35.1 29.611,31.471 29.851,31.711 C7.2 ; v1(27.231,33.393) 28.808,33.393 29.515,32.687 30.42,32.687 30.584,32.522 C7.2 ; v1(28.605,36.363) 28.776,36.533 JR1.2 ; JR1.2@28.74,37.142 30.505,37.142 C9.2 ; C12.1 30.592,38.989 C9.2 ; v1@31.514,32.502 31.514,31.991 31.233,31.711 C7.2 ; S1.1 33.279,41.892 33.279,38.526 32.754,38.001 32.088,38.001 31.143,37.056 C9.2 ; C11.1 34.875,27.924 Q8.3 ; v1(35.278,33.894) 35.278,34.534 36.018,35.274 C8.1 ; S2.2@40.886,12.626 39.769,11.509 39.769,9.324 ; S2.2@40.912,8.181 39.769,9.324 ; 13.345,9.324 39.769,9.324
  Top Layer w0.381: v1@0.554,21.463 1.6,20.417 USB.5 5.116,20.417 ; S3.2@1.488,12.626 4.907,12.626 5.466,13.185 ; S3.2@1.514,8.181 1.641,8.054 4.811,8.054 5.466,8.71 ; v1(5.751,20.848) 5.751,20.584 5.583,20.417 5.116,20.417 ; v1@6.474,22.121 U4.2 ; v1@7.925,6.591 7.287,6.591 6.718,6.591 5.466,7.844 5.466,8.71 ; 5.116,20.417 5.466,20.066 5.466,13.185 ; 5.466,8.71 5.466,13.185
  Top Layer w0.508: 12.063,43.178 12.481,42.761 12.548,42.761 12.77,42.539 R39.1 12.744,42.131 C15.1 ; v1@13.619,14.272 14.595,15.248 30.208,15.248 32.52,17.559 v1@32.52,21.328 ; v1(20.94,23.381) 21.968,22.352 v1@21.968,21.163 ; v1(21.689,20.343) 21.689,20.884 v1@21.968,21.163 ; v1(32.52,21.331) v1@32.52,21.328 ; C11.1 33.17,21.979 v1@32.52,21.328 ; v1@49.317,38.387 49.418,38.285 R36.2 49.987,20.696 v1(49.987,19.517) ; v1@21.968,21.163 32.355,21.163 v1@32.52,21.328
  Top Layer w0.762: USB.8@1.044,18.105 0.554,18.595 0.554,21.463 0.554,24.828 1.044,25.319 1.53,25.805 1.53,28.319 3.182,28.319 4.275,27.226 5.608,27.226 6.165,27.783 6.165,30.597 v1(5.893,30.869) URT1.1
  Bottom Layer w0.279: Q5.3 0.32,37.389 v1(0.328,37.396) ; v1(1.994,37.978) 2.372,37.6 3.949,37.6 4.009,37.54 ; v1@5.893,30.851 3.277,30.851 2.914,31.214 2.914,33.689 2.908,33.695 2.908,34.486 3.274,34.851 R29.1 3.79,36.467 Q6.3 3.67,37.201 4.009,37.54 ; R27.1 7.2,36.348 Q7.3 6.896,36.652 6.896,37.909 6.446,38.359 ; v1@11.415,43.409 10.198,43.409 9.578,42.789 9.578,40.556 9.101,40.079 7.109,40.079 6.446,39.415 6.446,38.359 ; v1(42.931,36.337) 43.658,35.611 45.014,35.611 45.557,35.067 45.557,34.211 46.172,33.596 Q2.3@46.891,33.596 ; 4.009,37.54 4.567,38.097 5.357,38.097 5.618,38.359 6.446,38.359
  Bottom Layer w0.305: v1(0.165,35.735) 0.165,36.49 Q5.3 ; v1(7.917,6.584) 8.067,6.734 R47.3 12.388,6.734 v1@13.36,7.706 ; C21.2 14.448,14.262 15.182,13.528 OLED1.1 ; v1(17.239,37.341) 18.219,37.341 18.357,37.478 C1.1 18.706,38.715 C19.1 ; OLED1.8 20.082,10.444 ; v1(20.086,9.342) 20.082,9.346 20.082,10.444 ; OLED1.10 21.482,10.423 21.778,10.127 ; OLED1.12 22.882,10.403 22.606,10.127 ; C6.1 24.648,25.728 24.917,25.458 24.917,24.329 24.464,23.876 C2.2 ; OLED1.13 23.582,10.305 23.404,10.127 22.606,10.127 ; OLED1.16 25.682,10.368 ; v1(25.766,9.322) 25.682,9.406 25.682,10.368 ; OLED1.17 26.382,10.509 26.782,10.109 ; v1(27.036,38.062) 27.132,38.159 J3.1 ; C20.1@27.944,37.024 v1(28.605,36.363) ; OLED1.21 29.182,10.363 29.436,10.109 ; OLED1.22 29.882,10.344 30.117,10.109 ; OLED1.23 30.582,10.327 30.8,10.109 ; OLED1.24 31.282,10.501 31.674,10.109 ; v1(31.481,32.56) 31.481,33.101 32.382,34.003 35.169,34.003 v1(35.278,33.894) 35.278,32.708 35.578,32.408 38.88,32.408 39.36,31.928 R17.1 ; OLED1.25 31.982,10.502 32.375,10.109 ; OLED1.29 34.782,10.421 34.47,10.109 ; OLED1.30 35.482,10.471 35.121,10.109 34.47,10.109 ; J2.1 38.471,37.02 v1@38.669,36.822 ; Q3.3 40.447,33.494 R17.1 ; Q4.3 44.909,41.427 44.574,41.092 44.574,39.533 44.935,39.172 47.404,39.172 47.678,38.898 R14.1 48.551,38.261 ; v1(49.373,38.372) 49.262,38.261 48.551,38.261 ; 20.082,10.444 20.399,10.127 21.778,10.127 ; 21.778,10.127 22.606,10.127 ; 25.682,10.368 25.941,10.109 26.782,10.109 ; 26.782,10.109 29.436,10.109 ; 29.436,10.109 30.117,10.109 ; 30.117,10.109 30.8,10.109 ; 30.8,10.109 31.674,10.109 ; 31.674,10.109 32.375,10.109 ; 32.375,10.109 34.47,10.109 ; R17.1 40.952,31.928 41.283,31.598 41.283,28.959 41.465,28.776 42.896,28.776 46.061,31.941 R16.1 46.891,33.596 Q2.3 46.847,34.653 47.051,34.856 48.494,34.856 48.831,35.194 48.831,37.981 48.551,38.261
  Bottom Layer w0.381: v1(5.751,20.848) 6.015,20.848 6.495,21.328 v1(6.495,22.113) ; U1.4 12.657,35.804 14.323,37.47 14.872,37.47 15.573,38.171 ; v1(15.992,39.119) 15.992,38.616 16.005,38.603 15.573,38.171 ; C5.1 18.853,23.837 19.045,23.645 19.045,23.172 19.182,23.035 U2.2 20.617,23.035 v1@20.917,23.335 ; C1.1 18.162,38.171 15.573,38.171 ; C3.2 26.289,24.615 27.389,25.715 32.956,25.715 v1@33.21,25.461 ; v1@27.366,33.477 27.944,34.055 27.944,37.024 C20.1
  Bottom Layer w0.508: R9.1 16.327,25.25 C4.2 18.133,23.88 C5.1 ; C22.2 C24.2 C23.2 ; C2.2@24.464,23.876 C3.2 ; C18.2 26.538,20.279 27.206,20.947 v1(27.206,21.006) ; J3.1 27.944,38.376 C20.1 ; R44.2 31.968,20.319 C25.2 ; v1(32.52,21.331) 33.599,21.331 33.772,21.158 C25.2 ; v1@49.98,19.553 49.98,19.182 49.05,18.252 40.396,18.252 38.33,20.319 C26.2 C25.2
  other v1: 10.559,3.701 9.152,4.023 10.759,4.605 9.103,5.055 11.384,5.309 9.515,5.913 12.088,6.012 10.239,6.457 13.018,9.368 13.998,9.401 14.879,9.401 13.622,11.003 12.855,11.293 14.364,11.443 5.156,14.265 13.619,14.249 3.498,14.376 5.136,15.326 3.498,15.438 5.113,16.368 3.388,16.5 5.113,17.429 4.348,18.176 5.377,18.392 4.783,18.712 5.695,18.974 21.745,19.484 0.447,20.269 6.294,20.475 21.722,21.118 35.397,21.247 34.674,21.262 33.833,21.293 33.139,21.328 0.467,21.336 36.243,21.359 0.488,22.403 0.429,23.467 33.175,25.524 43.271,29.825 43.259,30.627 43.297,31.455 43.284,32.349 42.448,36.802 38.753,38.473 33.856,40.711 33.828,41.633 33.995,42.517 9.555,43.414 8.86,43.437
LED: R40.2 U3.19 | length 38.1
  Top Layer w0.279: U3.19 19.444,36.398 20.704,35.138 20.718,35.138 21.236,34.621 21.236,33.992 20.663,33.419 v1(20.663,33.449)
  Top Layer w0.305: v1(36.083,28.743) 36.096,28.73 36.096,26.142 v1(36.723,25.514) ; R40.2 v1@39.9,22.529
  Bottom Layer w0.279: v1(20.663,33.449) 20.556,33.343 20.556,28.999 21.214,28.341 30.077,28.341 30.356,28.062 35.377,28.062 v1@36.109,28.793
  Bottom Layer w0.305: v1@36.708,25.575 39.632,25.575 39.865,25.342 v1(39.865,22.509)
NetC6_2: C6.2 U2.4 | length 2.4
  Bottom Layer w0.305: C6.2 22.433,25.728 22.639,25.522 U2.4
NetC7_1: C7.1 U3.5 XTAL1.2 | length 10.3
  Top Layer w0.279: U3.5 30.116,34.079 30.734,33.461 32.239,33.461 XTAL1.2
NetC9_1: C9.1 U3.6 XTAL1.1 | length 10.3
  Top Layer w0.279: U3.6 29.865,34.579 C9.1 ; C9.1@30.592,35.296 C9.1@30.991,35.296 ; C9.1@31.051,35.171 31.186,35.306 32.347,35.306 XTAL1.1
NetC10_1: C10.1 LS1.2 Q8.2 | length 10.7
  Top Layer w0.381: C10.1 36.416,30.444 37.417,29.443 Q8.2 42.378,28.831 LS1.2
NetC11_2: C11.2 Q8.1 R34.1 R35.2 | length 5.6
  Top Layer w0.508: R34.1@31.377,27.932 31.496,28.052 31.496,29.629 R35.2 33.08,29.764 C11.2 34.81,29.674 Q8.1
NetC18_1: C18.1 OLED1.14 R43.2 | length 10.7
  Bottom Layer w0.305: R43.2 24.638,19.751 24.973,19.416 26.124,19.416 26.452,19.088 C18.1
  Bottom Layer w0.381: OLED1.14 24.282,17.002 24.59,17.31 26.068,17.31 26.452,17.694 C18.1
NetC25_1: C25.1 OLED1.27 | length 5.9
  Bottom Layer w0.381: OLED1.27 33.382,16.727 33.772,17.117 C25.1
NetC26_1: C26.1 C27.2 OLED1.28 | length 8.2
  Bottom Layer w0.381: OLED1.28 34.082,16.416 35.545,17.879 C27.2 C26.1
NetC28_1: C28.1 OLED1.4 | length 5.9
  Bottom Layer w0.381: C28.1 16.954,17.551 17.282,17.224 OLED1.4
NetC28_2: C28.2 OLED1.5 | length 8.4
  Bottom Layer w0.381: C28.2 17.695,20.329 17.982,20.042 OLED1.5
NetC29_1: C29.1 OLED1.2 | length 6.2
  Bottom Layer w0.381: C29.1 14.887,17.508 15.882,16.513 OLED1.2
NetC29_2: C29.2 OLED1.3 | length 8.7
  Bottom Layer w0.381: C29.2 15.61,20.339 15.89,20.058 15.89,17.643 16.582,16.951 OLED1.3
NetF1_1: F1.1 Q1.3 | length 3
  Bottom Layer w0.66: Q1.3 10.373,23.345 F1.1
NetJ1_2: R4.1 URT1.2 | length 2.4
  Top Layer w0.305: URT1.2 6.448,32.139 R4.1
NetJ1_3: R1.1 URT1.3 | length 3.2
  Top Layer w0.305: URT1.3 5.593,33.409 5.707,33.523 5.707,34.282 5.954,34.529 R1.1
NetJ2_2: J2.2 R15.1 | length 2.1
  Bottom Layer w0.305: J2.2 37.201,37.415 R15.1
NetJ2_3: J2.3 R13.1 | length 2.2
  Bottom Layer w0.305: R13.1 35.997,37.512 35.997,39.121 J2.3
NetJ3_2: J3.2 R20.1 | length 2.1
  Bottom Layer w0.381: J3.2 26.109,38.941 R20.1
NetJ3_3: J3.3 R18.1 | length 2.2
  Bottom Layer w0.381: R18.1 24.272,38.867 J3.3
NetJ4_2: R30.2 U4.1 USB.2 | length 9.2
  Top Layer w0.279: USB.2 5.773,22.367 6.477,23.071 U4.1 7.355,22.972 8.339,22.972 8.593,22.718 8.593,21.214 9.291,20.516 9.934,20.516 10.262,20.188 R30.2
NetJ4_3: R31.2 U4.3 USB.3 | length 6
  Top Layer w0.279: USB.3 5.903,21.717 6.449,21.171 U4.3 7.902,21.171 8.4,20.673 R31.2
NetOLED1_26: OLED1.26 R44.1 | length 6
  Bottom Layer w0.381: R44.1 31.938,17.597 32.682,16.853 OLED1.26
NetPWR1_2: PWR1.2 R36.1 | length 2
  Top Layer w0.305: PWR1.2 47.622,21.311 R36.1
NetQ1_1: Q1.1 R9.2 | length 1.6
  Bottom Layer w0.508: Q1.1 13.823,25.969 R9.2
NetQ2_1: Q2.1 R10.2 R16.2 | length 3.6
  Bottom Layer w0.381: R10.2 48.661,33.554 Q2.1
NetQ2_2: Q2.2 RGB2.6 | length 7.9
  Top Layer w0.381: v1@43.693,39.248 RGB2.6
  Bottom Layer w0.381: v1(43.701,39.174) 43.701,36.551 44.111,36.14 Q2.2
NetQ3_1: Q3.1 R11.1 R17.2 | length 3.6
  Bottom Layer w0.381: Q3.1 42.212,33.629 R11.1
NetQ3_2: Q3.2 RGB2.5 | length 7
  Top Layer w0.381: v1@42.067,39.403 v1(42.067,39.411) 42.067,40.973 42.456,41.362 RGB2.5
  Bottom Layer w0.381: Q3.2 41.234,38.578 v1(42.067,39.411)
NetQ4_1: Q4.1 R12.1 R14.2 | length 6.6
  Bottom Layer w0.381: R12.1 47.65,40.039 R14.2 47.678,40.561 47.297,40.942 47.297,43.033 47.003,43.327 Q4.1
NetQ4_2: Q4.2 RGB2.4 | length 4.1
  Top Layer w0.305: RGB2.4 44.796,42.462 44.973,42.639 44.973,43.114 v1(44.686,43.401)
  Bottom Layer w0.305: Q4.2 44.15,42.377 44.668,42.896 v1@44.668,43.322
NetQ5_1: Q5.1 R24.2 R28.2 | length 3.7
  Bottom Layer w0.254: R24.2 2.153,34.851 R28.2 2.135,36.56 Q5.1
NetQ5_2: Q5.2 RGB1.6 | length 8.9
  Top Layer w0.305: 2.748,39.108 3.038,39.398 9.182,39.398 RGB1.6
  Bottom Layer w0.305: Q5.2 2.288,39.145 v1(2.37,39.063)
NetQ6_1: Q6.1 R25.1 R29.2 | length 3.6
  Bottom Layer w0.305: Q6.1 5.54,36.556 R29.2 5.57,34.821 R25.1
NetQ6_2: Q6.2 RGB1.5 | length 13.1
  Top Layer w0.305: v1(3.602,38.285) 4.219,38.903 10.838,38.903 11.468,39.533 11.468,41.018 11.125,41.362 RGB1.5
  Bottom Layer w0.305: v1(3.602,38.285) 3.602,38.887 3.801,39.086 Q6.2
NetQ7_1: Q7.1 R26.1 R27.2 | length 3.6
  Bottom Layer w0.305: Q7.1 8.95,36.498 R27.2 9.026,34.793 R26.1
NetQ7_2: Q7.2 RGB1.4 | length 11.1
  Top Layer w0.305: v1(7.556,37.958) 7.556,38.036 7.927,38.407 11.135,38.407 11.963,39.235 11.963,42.014 11.516,42.462 RGB1.4
  Bottom Layer w0.305: v1(7.556,37.958) 7.556,38.036 7.912,38.392 Q7.2
NetR2_2: R2.2 RGB2.1 | length 2.6
  Top Layer w0.305: R2.2@37.836,42.807 38.824,42.807 39.169,42.462 RGB2.1
NetR5_2: R5.2 RGB2.2 | length 2.7
  Top Layer w0.305: R5.2 38.509,40.927 38.943,41.362 RGB2.2
NetR6_2: R6.2 RGB2.3 | length 3.3
  Top Layer w0.305: R6.2 38.499,39.108 38.844,39.454 38.844,39.947 39.159,40.262 RGB2.3
NetR7_1: R7.1 U1.7 | length 7.2
  Bottom Layer w0.305: R7.1 11.565,41.537 11.816,41.285 11.816,39.926 11.951,39.792 14.813,39.792 15.197,40.175 U1.7
NetR8_2: R8.2 U1.3 | length 2.9
  Bottom Layer w0.305: U1.3 13.933,34.567 R8.2
NetR19_1: R19.1 U2.3 | length 3.1
  Bottom Layer w0.305: R19.1 18.738,25.725 19.147,25.316 19.147,24.359 19.52,23.985 U2.3 U2.3@20.053,24
NetR21_2: R21.2 RGB1.1 | length 3.2
  Top Layer w0.381: v1@4.95,41.869 5.543,42.462 RGB1.1
  Bottom Layer w0.381: v1(5.034,41.852) 5.034,41.899 R21.2
NetR22_2: R22.2 RGB1.2 | length 2.7
  Top Layer w0.305: RGB1.2 7.912,41.362 v1@8.315,41.764
  Bottom Layer w0.305: R22.2 8.377,41.652 v1(8.377,41.702)
NetR23_2: R23.2 RGB1.3 | length 2.3
  Top Layer w0.305: v1(5.227,40.259) 5.23,40.262 RGB1.3
  Bottom Layer w0.305: v1(5.227,40.259) 5.804,40.836 R23.2
NetR32_1: R32.1 U4.6 | length 3.5
  Top Layer w0.279: R32.1 8.352,24.117 8.557,23.912 9.848,23.912 10.056,23.703 U4.6
NetR33_1: R33.1 U4.4 | length 5.2
  Top Layer w0.279: U4.4 10.886,21.171 11.057,21.341 11.057,23.388 10.743,23.701 10.731,23.701 10.206,24.227 R33.1@10.206,25.062
NetR40_1: R40.1 STS1.2 | length 2
  Top Layer w0.305: R40.1 41.695,21.311 STS1.2
REV01: 
REV02: 
RGB1_BLUE: R24.1 U3.27 | length 18.8
  Top Layer w0.279: v1@0.409,31.867 0.409,32.796 4.191,36.579 7.974,36.579 7.977,36.576 15.591,36.576 U3.27
  Bottom Layer w0.279: v1(0.399,31.88) 0.403,31.883 R24.1
RGB1_GRE: R25.2 U3.26 | length 16.2
  Top Layer w0.279: v1@6.246,37.749 6.921,37.074 15.589,37.074 U3.26
  Bottom Layer w0.279: R25.2 4.407,33.01 4.679,33.282 4.679,37.137 5.083,37.541 6.142,37.541 v1(6.236,37.635)
RGB1_RED: R26.2 U3.25 | length 12.8
  Top Layer w0.279: v1(8.445,37.734) 8.575,37.864 11.333,37.864 11.618,37.579 U3.25
  Bottom Layer w0.279: R26.2 7.91,33.012 8.059,33.162 8.059,37.412 v1@8.303,37.655
RGB2_BLUE: R10.1 U3.45 | length 32.2
  Top Layer w0.279: U3.45 20.944,26.392 21.267,26.068 26.525,26.068 v1@26.838,26.38
  Bottom Layer w0.305: v1(26.825,26.37) 26.947,26.248 41.069,26.248 44.945,30.124 R10.1
RGB2_GRE: R11.2 U3.46 | length 26.1
  Top Layer w0.254: U3.46 21.444,26.92 21.725,26.64 24.912,26.64 v1@25.049,26.777
  Bottom Layer w0.305: v1(25.07,26.769) 25.593,27.292 27.821,27.292 28.283,26.83 39.555,26.83 40.462,27.737 R11.2
RGB2_RED: R12.2 U3.41 | length 39.1
  Top Layer w0.305: v1@18.484,28.12 18.944,28.58 U3.41 ; v1@37.673,30.711 38.24,31.278 38.24,34.666 38.992,35.418 43.767,35.418 44.729,36.38 v1(44.729,36.866)
  Bottom Layer w0.305: v1(18.534,28.037) 18.534,27.983 18.659,27.859 29.877,27.859 30.156,27.579 37.01,27.579 37.722,28.291 37.722,30.645 v1(37.673,30.693) ; v1@44.734,36.815 45.481,36.815 45.789,37.122 R12.2
RST: C12.2 R38.2 S1.2 U3.7 | length 19.1
  Top Layer w0.305: U3.7 26.354,35.079 26.344,35.069 27.378,35.069 27.879,35.57 27.879,36.174 27.874,36.179 27.874,38.616 28.367,39.108 C12.2 28.961,39.802 ; S1.2@25.961,42.202 28.677,42.202 28.961,41.918 28.961,39.802 ; R38.2@32.48,39.129 32.48,39.806 32.136,40.15 29.309,40.15 28.961,39.802
RXD1: R1.2 U3.31 | length 13.1
  Top Layer w0.305: R1.2 7.94,34.529 7.663,34.252 7.663,31.473 7.897,31.239 9.065,31.239 9.738,31.913 9.738,31.92 12.397,34.579 U3.31
RXD2: R13.2 U3.13 | length 33.3
  Top Layer w0.254: U3.13 22.444,43.195 23.038,43.79 38.798,43.79 v1@39.154,43.434
  Bottom Layer w0.254: R13.2 35.634,36.025 35.814,36.205 39.312,36.205 39.566,36.459 39.566,37.129 39.56,37.134 39.56,43.04 v1(39.116,43.485)
RXD3: R18.2 U3.22 | length 12.6
  Top Layer w0.305: U3.22 17.944,34.777 19.243,33.477 v1@19.733,33.477
  Bottom Layer w0.305: v1(19.721,33.571) 19.721,34.902 20.192,35.373 R18.2
SCL: OLED1.18 R46.1 U3.42 | length 27.6
  Top Layer w0.279: U3.42 19.444,17.584 20.315,16.713 26.792,16.713 v1@27.137,16.368
  Bottom Layer w0.381: OLED1.18 27.082,16.343 28.265,17.526 R46.1
  other v1: 27.14,16.353
SDA: OLED1.19 OLED1.20 R48.1 U3.43 | length 32.7
  Top Layer w0.305: U3.43 19.944,17.938 20.627,17.254 28.57,17.254 v1@28.847,16.977
  Bottom Layer w0.381: OLED1.19 27.782,15.966 ; OLED1.20 28.482,15.266 27.782,15.966 ; R48.1 30.086,17.371 29.705,16.99 28.806,16.99 27.782,15.966
  other v1: 28.837,16.98
SEL_KEY: C19.2 R41.2 S3.1 U3.11 | length 64.8
  Top Layer w0.279: v1(23.597,42.08) 23.617,42.06 23.617,41.349 25.354,39.611 25.354,37.468 24.966,37.079 U3.11
  Top Layer w0.381: S3.1@9.159,12.576 9.159,13.698 8.832,14.026 6.695,14.026 6.413,14.308 ; S3.1@9.235,8.131 7.269,8.131 6.413,8.987 6.413,14.308 ; v1(10.935,29.837) 10.935,28.364 12.009,27.29 12.009,18.793 11.666,18.451 7.28,18.451 6.413,17.584 R41.2 6.413,14.308
  Bottom Layer w0.279: v1(10.935,29.837) 10.066,30.706 10.066,35.202 14.173,39.309 15.013,39.309 15.554,39.85 16.891,39.85 17.468,39.273 19.149,39.273 19.47,39.595 21.035,39.595 C19.2 22.578,39.378 22.578,41.062 v1(23.597,42.08)
SPI_MISO: U1.2 U3.16 | length 9.4
  Top Layer w0.305: v1@20.944,37.159 U3.16
  Bottom Layer w0.305: U1.2 15.197,35.933 15.897,36.634 20.357,36.634 v1(20.947,37.224)
SPI_MOSI: U1.5 U3.17 | length 12.3
  Top Layer w0.305: v1@12.781,43.63 13.18,43.231 17.496,43.231 20.444,40.283 U3.17
  Bottom Layer w0.305: U1.5 12.657,43.099 v1@12.807,43.249
  other v1: 12.802,43.536
SPI_NSS: R3.2 U1.1 U3.14 | length 8.4
  Top Layer w0.279: v1@21.587,36.515 21.944,36.871 U3.14
  Bottom Layer w0.279: U1.1 17.149,34.573 18.418,35.842 R3.2 20.985,35.86 21.463,36.337 v1(21.463,36.459)
SPI_SCK: U1.6 U3.15 | length 12.4
  Top Layer w0.305: v1(18.865,42.926) 19.106,42.926 21.444,40.588 U3.15
  Bottom Layer w0.305: U1.6 13.927,43.114 14.417,43.604 18.26,43.604 v1@18.89,42.974
SWCLK: J5.2 U3.37 | length 38.3
  Top Layer w0.305: J5.2 5.677,2.799 6.066,2.41 9.246,2.41 9.835,3 9.835,4.971 11.709,6.845 v1(11.709,16.553) ; v1@12.614,18.263 12.614,26.7 13.287,27.374 v1(14.47,27.374) ; v1@16.058,28.064 16.426,28.064 16.944,28.582 U3.37
  Bottom Layer w0.305: v1@11.774,16.557 12.596,17.379 v1(12.596,18.247) ; v1@14.486,27.399 15.458,27.399 v1(16.167,28.108)
SWDIO: J5.3 U3.34 | length 40.9
  Top Layer w0.305: v1(1.676,23.635) 3.335,25.293 6.413,25.293 7.181,26.06 v1@7.181,29.708 ; v1@9.682,29.347 9.682,29.768 11.173,31.259 11.176,31.259 12.996,33.079 U3.34
  Bottom Layer w0.305: v1@1.689,23.619 1.689,19.667 4.407,16.949 J5.3 ; v1(7.203,29.7) 7.546,29.357 v1(9.738,29.357)
TXD1: R4.2 U3.30 | length 8.2
  Top Layer w0.305: R4.2 9.283,32.436 11.926,35.079 U3.30
TXD2: R15.2 U3.12 | length 30.5
  Top Layer w0.305: U3.12 23.432,37.579 23.096,37.915 23.096,40.333 22.914,40.515 22.914,43.001 23.202,43.289 35.037,43.289 35.181,43.144 35.181,35.339 v1(34.562,34.719)
  Bottom Layer w0.305: v1(34.562,34.719) 34.656,34.625 36.885,34.625 37.468,35.207 R15.2
TXD3: R20.2 U3.21 | length 12.6
  Top Layer w0.279: U3.21 18.444,35.628 19.601,34.47 20.437,34.47 v1(20.444,34.478)
  Bottom Layer w0.279: v1(20.444,34.478) 25.4,34.478 25.733,34.145 26.109,34.521 R20.2
USB_DM: R32.2 U3.32 | length 12.9
  Top Layer w0.279: R32.2 8.351,29.784 12.627,34.059 15.574,34.059 U3.32 ; 14.45,34.079 U3.32@15.401,34.079
USB_DP: R33.2 U3.33 | length 12.2
  Top Layer w0.279: R33.2@10.206,26.812 R33.2@10.206,26.831 ; R33.2 10.239,27.562 9.802,27.998 9.063,27.998 8.821,28.24 8.821,29.589 12.794,33.562 15.576,33.562 U3.33
VAGND: JR1.1 U3.8 | length 15
  Top Layer w0.305: v1@22.273,32.791 22.273,35.202 22.65,35.579 U3.8 ; JR1.1 28.776,35.466 v1(29.515,36.205)
  Bottom Layer w0.305: v1(22.187,32.781) 22.271,32.697 27.518,32.697 27.955,33.135 27.955,33.18 28.355,33.579 28.369,33.579 28.806,34.016 28.806,35.56 v1@29.505,36.258
VDDB: C21.1 OLED1.6 R45.2 | length 13.5
  Bottom Layer w0.381: R45.2 10.678,13.795 11.961,12.512 C21.1 12.032,10.864 12.733,10.163 18.192,10.163 18.682,10.653 OLED1.6
pads on no net: J2. J3. OLED1.7 U2.0 U3.2 U3.3 U3.4 U3.28 U3.29 U3.38 U3.39 U3.40 USB.4 USB.6 USB.7
copper on no net:
  other v2: 1.156,1.245 48.923,1.245 1.156,42.654 49.134,42.654

## Polygon pours and split planes (outlines as drawn)
GND on Top Layer "Top Layer-No Net" (solid, remove dead copper, pour order 4): 0.824,-0.586 ccw(c0.892,-0.478) 0.892,-0.605 10.659,-0.557 ccw(c10.701,-0.437) 10.718,-0.563 ccw(c10.527,0.834) 10.76,-0.557 10.783,-0.557 ccw(c10.782,-0.429) 10.846,-0.54 ccw(c10.527,0.834) 11.919,0.604 ccw(c11.808,0.668) 11.936,0.668 11.936,0.765 ccw(c10.527,0.834) 11.938,0.834 ccw(c10.527,0.834) 11.936,0.903 11.936,3.744 ccw(c11.816,3.787) 11.943,3.787 ccw(c11.816,3.787) 11.943,3.794 cw(c13.204,3.86) 13.138,5.12 ccw(c13.132,5.248) 13.167,5.125 37.132,5.082 ccw(c37.158,5.207) 37.164,5.08 cw(c37.225,3.844) 38.46,3.905 ccw(c38.588,3.912) 38.463,3.884 38.473,0.911 ccw(c38.595,0.876) 38.468,0.879 ccw(c39.914,0.846) 39.756,-0.592 ccw(c39.83,-0.488) 39.83,-0.615 49.701,-0.595 ccw(c49.736,-0.472) 49.757,-0.598 ccw(c49.544,0.664) 49.775,-0.595 49.81,-0.595 ccw(c49.809,-0.467) 49.886,-0.569 ccw(c49.544,0.664) 50.824,0.664 ccw(c49.544,0.664) 50.806,0.877 ccw(c50.681,0.856) 50.796,0.911 50.791,43.223 ccw(c50.676,43.277) 50.803,43.277 ccw(c50.676,43.276) 50.803,43.284 ccw(c49.639,43.216) 49.571,44.379 ccw(c49.578,44.252) 49.553,44.377 0.631,44.407 cw(c0.609,43.188) 0.632,44.407 0.631,44.407 ccw(c0.61,43.188) -0.596,43.372 ccw(c-0.495,43.294) -0.623,43.294 -0.623,1.369 ccw(c-0.495,1.369) -0.615,1.324 ccw(c1.177,1.177)
GND on Bottom Layer "Top Layer-No Net1" (solid, remove dead copper, pour order 5): 0.824,-0.586 ccw(c0.892,-0.478) 0.892,-0.605 10.659,-0.557 ccw(c10.701,-0.437) 10.718,-0.563 ccw(c10.527,0.834) 10.76,-0.557 10.783,-0.557 ccw(c10.782,-0.429) 10.846,-0.54 ccw(c10.527,0.834) 11.919,0.604 ccw(c11.808,0.668) 11.936,0.668 11.936,0.765 ccw(c10.527,0.834) 11.938,0.834 ccw(c10.527,0.834) 11.936,0.903 11.936,3.744 ccw(c11.816,3.787) 11.943,3.787 ccw(c11.816,3.787) 11.943,3.794 cw(c13.204,3.86) 13.138,5.12 ccw(c13.132,5.248) 13.167,5.125 37.132,5.082 ccw(c37.158,5.207) 37.164,5.08 cw(c37.225,3.844) 38.46,3.905 ccw(c38.588,3.912) 38.463,3.884 38.473,0.911 ccw(c38.595,0.876) 38.468,0.879 ccw(c39.914,0.846) 39.756,-0.592 ccw(c39.83,-0.488) 39.83,-0.615 49.701,-0.595 ccw(c49.736,-0.472) 49.757,-0.598 ccw(c49.544,0.664) 49.775,-0.595 49.81,-0.595 ccw(c49.809,-0.467) 49.886,-0.569 ccw(c49.544,0.664) 50.824,0.664 ccw(c49.544,0.664) 50.806,0.877 ccw(c50.681,0.856) 50.796,0.911 50.791,43.223 ccw(c50.676,43.277) 50.803,43.277 ccw(c50.676,43.276) 50.803,43.284 ccw(c49.639,43.216) 49.571,44.379 ccw(c49.578,44.252) 49.553,44.377 0.631,44.407 cw(c0.609,43.188) 0.632,44.407 0.631,44.407 ccw(c0.61,43.188) -0.596,43.372 ccw(c-0.495,43.294) -0.623,43.294 -0.623,1.369 ccw(c-0.495,1.369) -0.615,1.324 ccw(c1.177,1.177)

## Keep-outs
Keep-Out Layer:
  lines w0.254: -0.495,1.369 -0.495,43.294 ; -0.483,43.208 cw(c0.61,43.188) 0.63,44.28 49.593,44.249 ; -0.472,1.44 ccw(c1.177,1.177) 0.914,-0.472 ; 0.892,-0.478 10.782,-0.429 ; 10.701,-0.437 ccw(c10.527,0.834) 11.798,1.008 ; 11.808,0.668 11.808,3.828 ; 11.816,3.787 cw(c13.204,3.86) 13.132,5.248 ; 13.139,5.253 37.17,5.21 ; 37.158,5.207 cw(c37.225,3.844) 38.588,3.912 ; 38.59,4.006 38.6,0.8 ; 38.595,0.876 ccw(c39.914,0.846) 39.883,-0.472 ; 39.83,-0.488 49.809,-0.467 ; 49.578,44.252 cw(c49.639,43.216) 50.676,43.277 ; 49.736,-0.472 ccw(c49.544,0.664) 50.681,0.856 ; 50.664,43.31 50.668,0.62

## Other copper
Top Layer:
  region net 5V-USB: 3.449,23.218 5.504,23.218 5.654,23.368 5.654,24.818 5.751,24.915 7.262,24.915 7.33,24.846 7.33,23.701 7.15,23.595 6.506,23.595 6.129,23.218 5.751,22.84 3.462,22.812 3.444,22.83
Bottom Layer:
  region net GND: 21.313,21.344 22.055,21.344 22.301,21.097 22.301,19.39 22.179,19.268 21.303,19.268 21.168,19.403 21.168,21.179 21.384,21.394
  region net GND: 36.911,21.229 37.922,21.229 38.809,20.343 38.809,19.942 38.362,19.494 37.399,19.494 37.399,19.594
  region net 5V-USB: 5.657,23.929 5.657,24.828 5.74,24.912 7.249,24.912 7.348,24.813 7.333,24.798 7.333,23.576 7.148,23.391 5.763,23.391
  region net GND: 0.061,36.251 0.605,36.251 0.663,36.192 0.663,35.108 0.511,34.955 0.478,34.989 0.061,34.989 -0.028,35.077 -0.028,36.152 0.005,36.185
  region net GND: 38.136,38.74 39.045,38.74 39.126,38.659 39.126,36.84 38.92,36.634 38.621,36.634 38.453,36.802 38.453,38.324 38.339,38.438
  region net GND: 38.08,40.383 38.979,40.383 39.042,40.32 39.042,38.392 38.885,38.235 38.194,38.235 38.062,38.367 38.062,40.356 38.026,40.391

## Silkscreen, mask and mechanical layers (free items; w line width, h text height)
Top Overlay:
  lines w0.127: 4.097,39.03 4.188,35.631 4.491,35.372
  lines w0.508: 11.758,26.505 38.57,26.505 ; 11.768,26.511 11.768,7.216 38.575,7.216 38.575,26.506
  text "5V" at 4.249,38.532 h0.66
  text "RX" at 4.277,37.61 h0.66
  text "TX" at 4.188,36.688 h0.66
  text "GND" at 4.277,35.857 h0.66
  text "CAL" at 43.739,13.998 h0.91
  text "SET" at 4.138,13.696 h0.91
  text "V1.0" at 44.361,0 h0.91
Bottom Overlay:
  text "2018-07-09" at 1.91,5.509 h0.91 r270
  text "By Awesome" at 0.422,4.214 h1.14 r270
Top Solder:
  text "MavSword" at 40.063,2.946 h1.22
Bottom Solder:
  text "MavSword" at 49.416,2.99 h1.22